# Altium PCB NanoEEG_1v1_ADC.PcbDoc
Units mil, origin at the board's own origin, x right, y up, seen from the top; angles counter-clockwise.
Board outline 2598.43 x 2047.24 mil, 2 copper layers (Top Layer, Bottom Layer), stack 65.792 mil thick; 33 components, 58 nets, 316 pads, 130 vias.
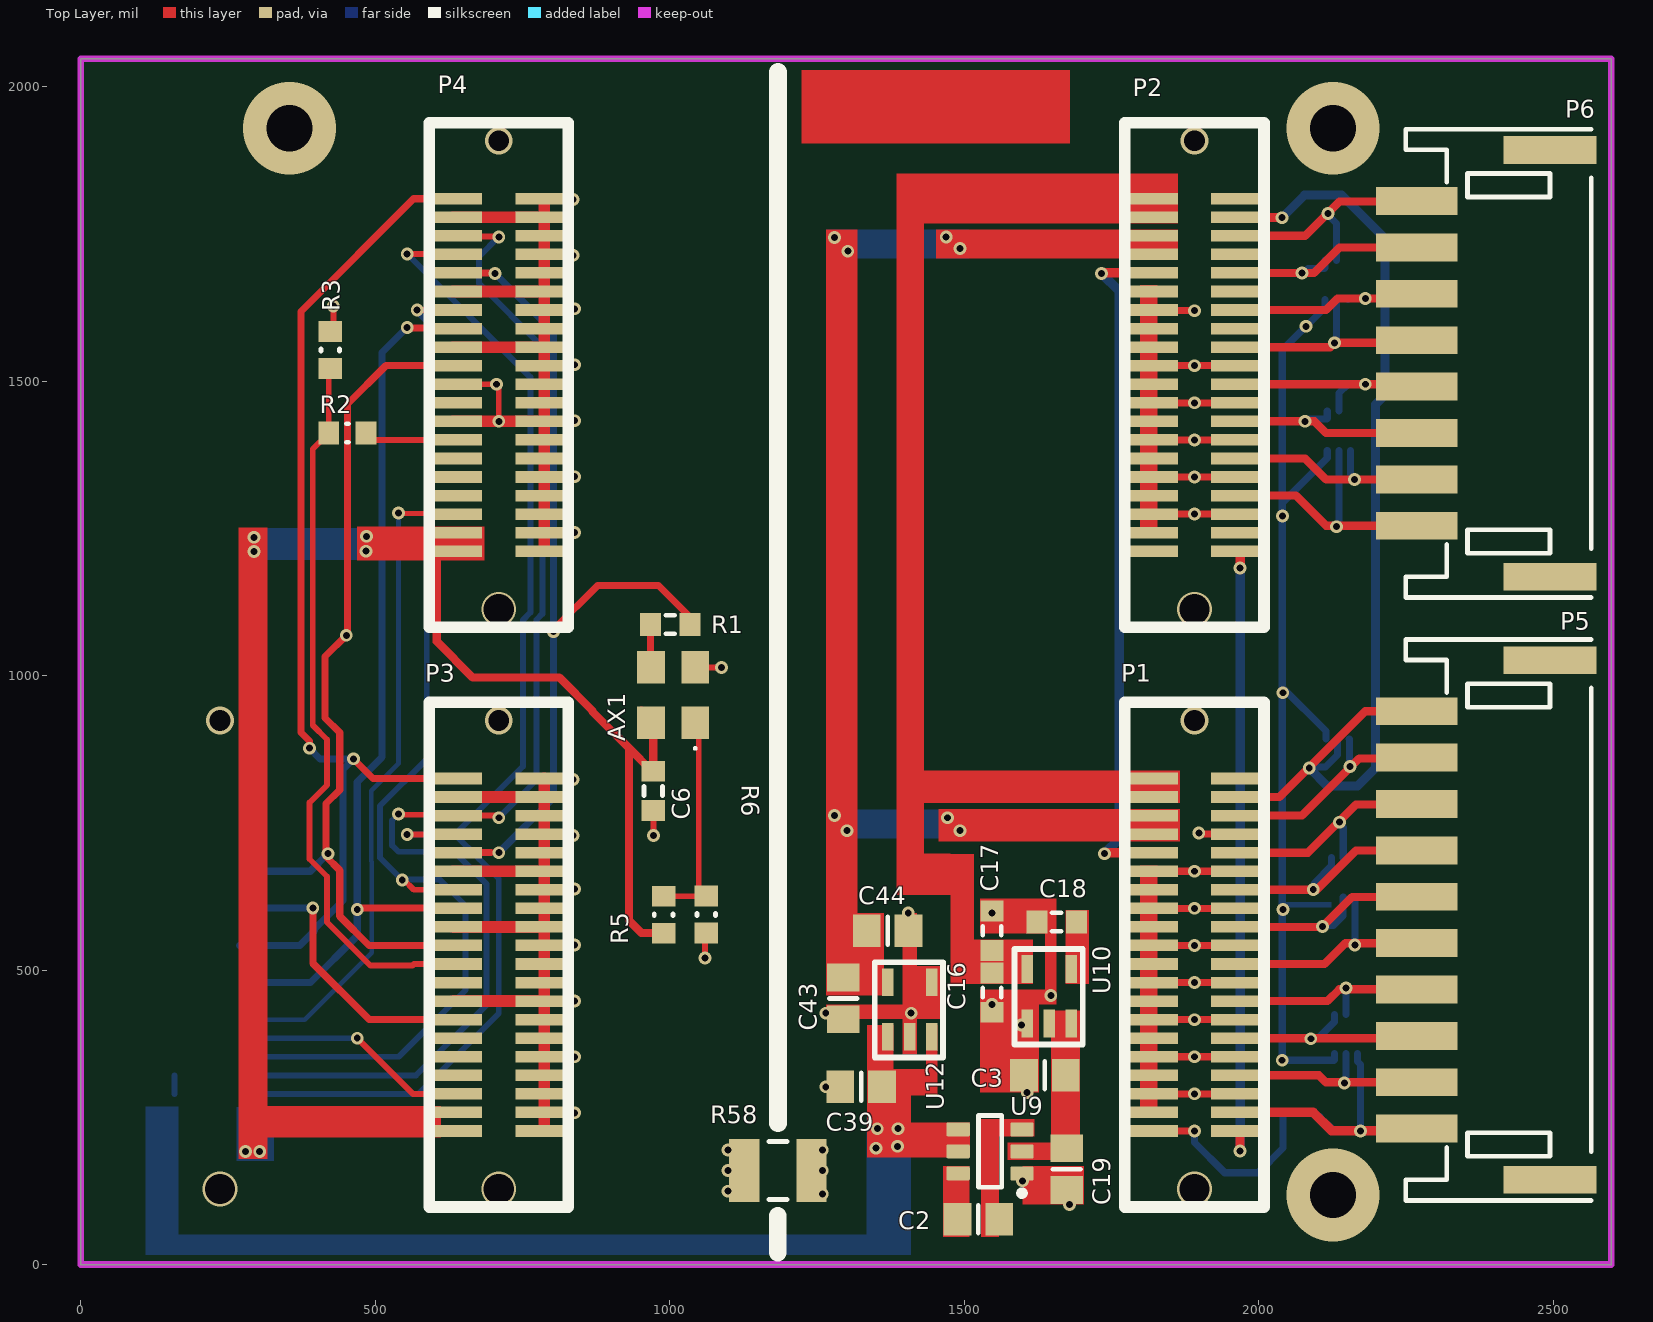
[diagram p0: Top Layer view]
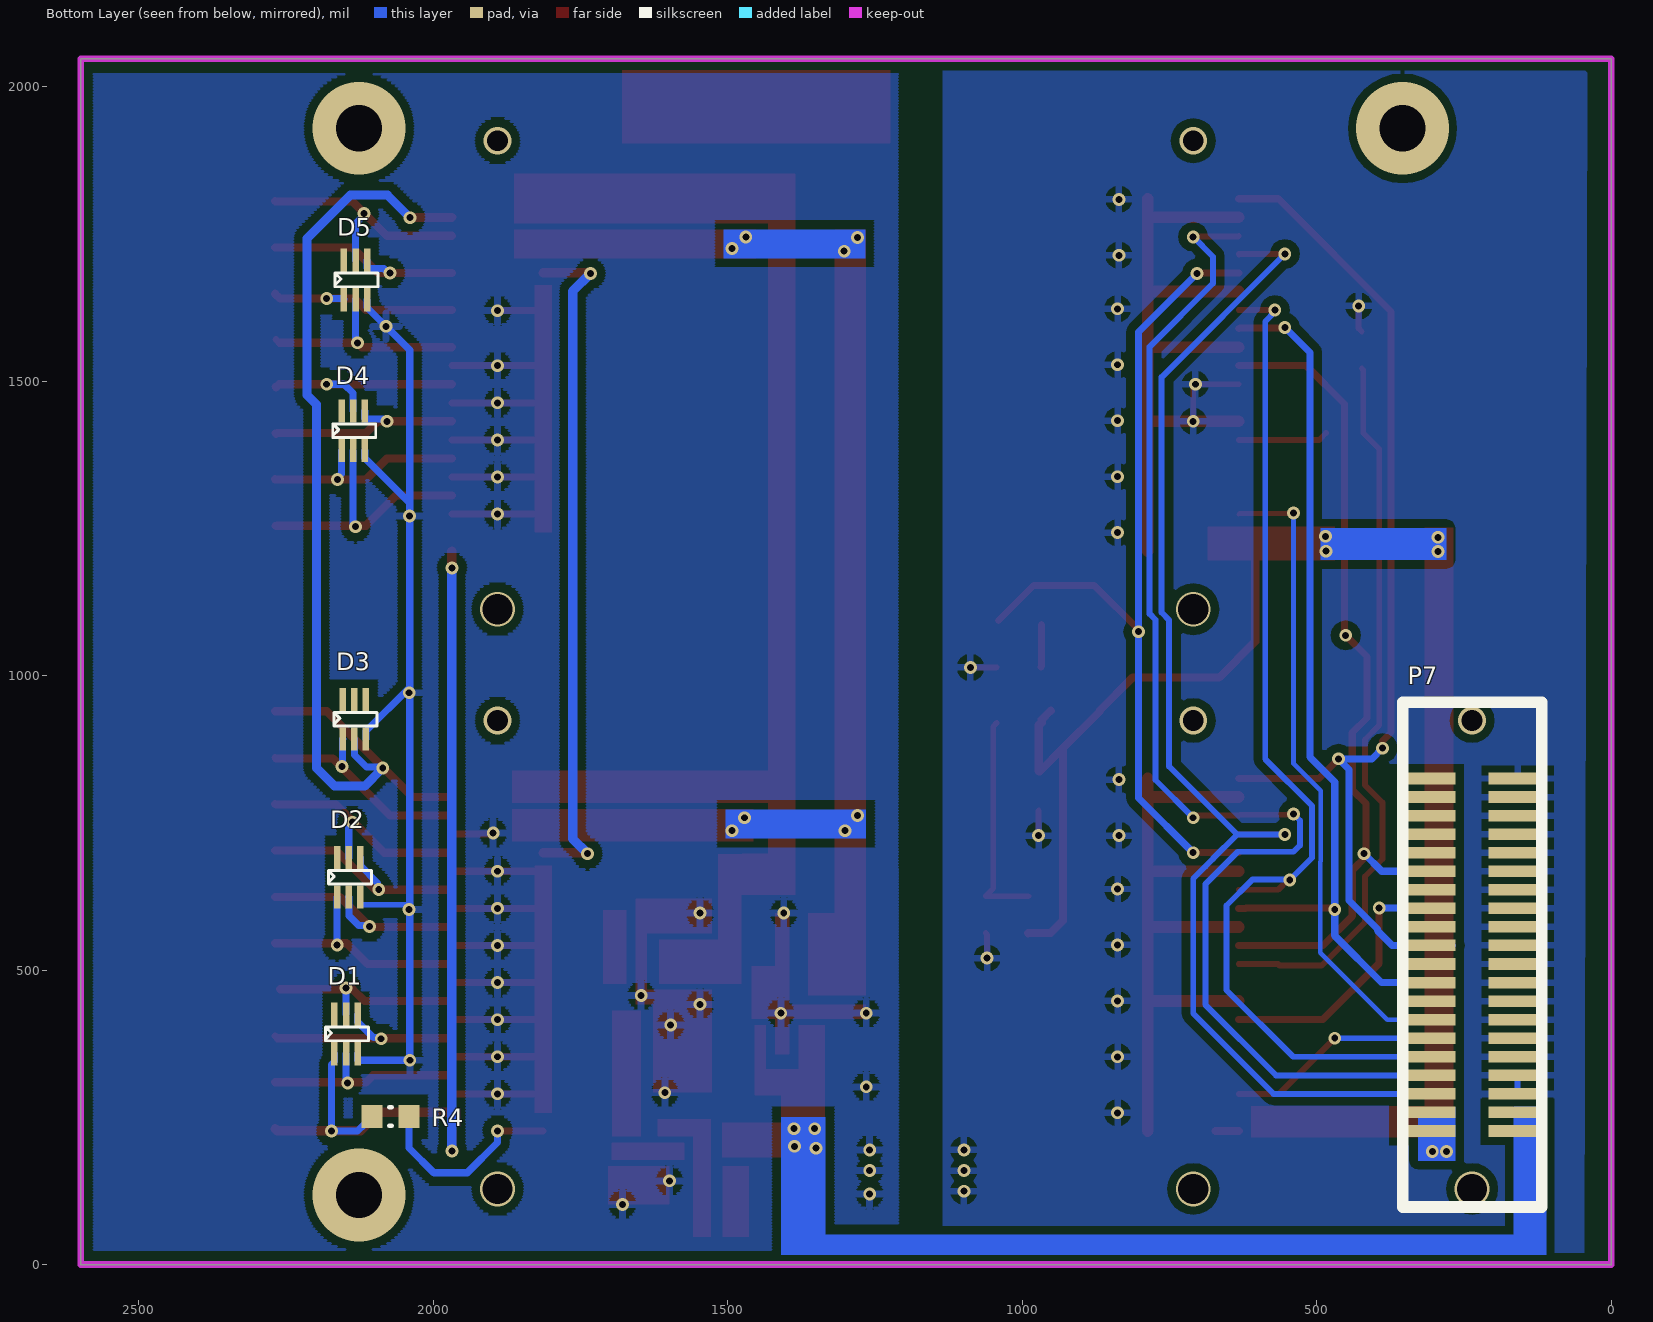
[diagram p1: Bottom Layer view, seen from below]

## Layer stack, top to bottom
Top Solder: solder mask 0.4, Solder Resist, Dk 3.5
Top Layer: signal copper 1.4
Dielectric1: core 62.9921, FR-4, Dk 4.8
Bottom Layer: signal copper 1.4
Bottom Solder: solder mask 0.4, Solder Resist, Dk 3.5

## Board outline
0,0 0,2047.24 2598.43,2047.24 2598.43,0.02

## Design rules (kind name [scope] priority, off if disabled: settings)
Clearance Clearance_1 [InPolygon] p1: gap=14 ignorepadtopadclearanceinfootprint=FALSE except(0: Arc-Hole Track-Hole SMDPad-Hole THPad-Hole Via-Hole Fill-Hole Poly-Hole Region-Hole Text-Hole)
Clearance [All] p2: gap=6 ignorepadtopadclearanceinfootprint=FALSE except(0: Arc-Hole Track-Hole SMDPad-Hole THPad-Hole Via-Hole Fill-Hole Poly-Hole Region-Hole Text-Hole)
FabricationTestPointUsage TestPointUsage [All] p1: valid=0 allowmultiple=FALSE
FabricationTestpoint Testpoint [(IsPad And (OnTopLayer Or OnBottomLayer))] p1: side=3 testpointundercomponent=TRUE minsize=40 maxsize=100 preferedsize=60 minholesize=0 maxholesize=40 preferedholesize=32 testpointgrid=1 allowsidetop=TRUE allowsidebottom=TRUE usegrid=TRUE gridtolerance=0.01
HoleSize [All] p1: absolutevalues=TRUE maxlimit=787.4 minlimit=11.81 maxpercent=80.000 minpercent=20.000
HoleToHoleClearance [All] p1: gap=0 allowstackedmicrovias=TRUE
MinimumSolderMaskSliver [All] p1: minsoldermaskwidth=0
PlaneClearance [All] p1: clearance=15.75
PlaneConnect [All] p1: planeconnectstyle=Direct reliefexpansion=11.81 reliefentries=4 reliefconductorwidth=11.81 reliefairgap=11.81
PolygonConnect [All] p1: connectstyle=Relief reliefconductorwidth=11.81 reliefentries=4 polygonreliefangle="90 Angle" airgapwidth=11.81
RoutingVias [All] p1: holewidth=19.68 width=51.18 viastyle="Through Hole" minholewidth=11.81 minwidth=19.68 maxholewidth=393.7 maxwidth=787.4
SilkToSilkClearance [All] p1: silktosilkclearance=0
SilkToSolderMaskClearance SilkscreenOverComponentPads [IsPad] p1: minsilkscreentomaskgap=0 clearancetoexposedcopper=TRUE
SolderMaskExpansion [All] p1: expansion=4
Width [All] p1: maxlimit=200 minlimit=6 preferedwidth=10
21 further rules are at their usual default settings.

## Components (designator, comment, footprint, x,y, rotation, side; value= is the part's Value field where it differs from the comment)
AX1 "2.048MHz" EPSON-SG-310-4_V 1005.79,966.98 r90 top
C2 "10UF" RESC2012N 1523.81,77.18 r180 top
C3 "2.2UF" RESC2012N 1636.88,321.82 r0 top
C6 "0.1uF" RESC1608N 972.03,804.11 r270 top
C16 "2.2UF" RESC1608N 1546.88,461.82 r90 top
C17 "2.2UF" RESC1608N 1546.88,566.82 r270 top
C18 "0.01UF" RESC1608N 1656.88,581.82 r0 top
C19 "10UF" RESC2012N 1673.81,162.18 r90 top
C39 "2.2UF" RESC2012N 1324.87,301.88 r0 top
C43 "2.2UF" RESC2012N 1294.87,451.88 r90 top
C44 "10UF" RESC2012N 1369.87,566.88 r180 top
D1 "TPD4E1B06" erjiguan 2167.61,358.05 r90 bottom
D2 "TPD4E1B06" erjiguan 2163.1,623.85 r90 bottom
D3 "TPD4E1B06" erjiguan 2153.58,892.45 r90 bottom
D4 "TPD4E1B06" erjiguan 2155.58,1382.46 r90 bottom
D5 "TPD4E1B06" erjiguan 2151.53,1638.16 r90 bottom
P1 "Header 20X2" FCI-B2B-0.8mm-40p-male 1968.2,825.31 r90 top locked
P2 "Header 20X2" FCI-B2B-0.8mm-40p-MALE 1968.2,1809.56 r90 top locked
P3 "Header 20X2" FCI-B2B-0.8mm-40p-male 787.1,825.31 r90 top locked
P4 "Header 20X2" FCI-B2B-0.8mm-40p-MALE 787.1,1809.56 r90 top locked
P5 "Header 10" PH2.0-WS-10P 2494.41,585.14 r90 top locked
P6 "Header 8" PH2.0-WS-8P 2494.41,1530.02 r90 top locked
P7 "Header 20X2" FCI-B2B-0.8mm-40p-FEMALE 158.86,226.89 r90 top locked
R1 "Res1" RESC1608N 1000.79,1086.98 r0 top value=0
R2 "Jumper" RESC0603(1608)_N 452.65,1411.91 r0 top value="0.00 Ohm"
R3 "Jumper" RESC0603(1608)_N 423.56,1552.78 r90 top value="0.00 Ohm"
R4 "Jumper" RESC0603(1608)_N 2072.58,251.18 r0 bottom value="0.00 Ohm"
R5 "Jumper" RESC0603(1608)_N 989.71,593.96 r90 top value="0.00 Ohm"
R6 "Jumper" RESC0603(1608)_N 1061.94,594.44 r270 top value="0.00 Ohm"
R58 "Res1" RESC3225N 1183.57,159.8 r180 top value=0
U9 "LM2664M6" DBV0006A_N 1543.81,192.18 r180 top
U10 "TPS72325" SOT23_5 1607.08,501.82 r0 top
U12 "TLV70025-Q1" SOT23_5 1370.07,479.4 r0 top

## Footprints (in the part's own frame and the unit in brackets; to place one, negate y for a bottom-side part, rotate by r counter-clockwise, add the part's x,y. Pads: shape width x height; smd on the part's side, far side on the other; paste and mask are expansions set on the pad)
DBV0006A_N [mm] "SOT23, 6-Leads, Body 3.05x1.75mm, Pitch 0.95mm, IPC Medium Density"
  rrect17% 1x0.6 smd: 1(-1.375,0.95) 2(-1.375,0) 3(-1.375,-0.95) 4(1.375,-0.95) 5(1.375,0) 6(1.375,0.95)
  silkscreen extent -1.5,-1.55 0.5,1.92, body extent -1.42,-1.46 1.42,1.46, height 1.11
EPSON-SG-310-4_V [mm] "SMD, 4-Leads, Body 3.2x2.5mm"
  rect 1.4x1.2 smd: 1(-1.2,-0.95) 2(1.2,-0.95) 3(1.2,0.95) 4(-1.2,0.95)
  silkscreen extent -2.35,-1 -2.25,-0.9, body extent -1.6,-1.25 1.6,1.25, height 1.05
erjiguan [mm]
  rect 1x0.28 smd: 1(0,0) 2(0,-0.5) 3(0,-1) 4(1.7,-1) 5(1.7,-0.5) 6(1.7,0)
  silkscreen extent 0.56,-1.47 1.14,0.38
FCI-B2B-0.8mm-40p-FEMALE [mm]
  rect 0.5x2.5 smd far side: 1(0,0) 1(0,0) 2(0,-3.93) 2(0,-3.93) 3(0.8,0) 4(0.8,-3.93) 5(1.6,0) 6(1.6,-3.93) 7(2.4,0) 8(2.4,-3.93) 9(3.2,0) 10(3.2,-3.93) 11(4,0) 12(4,-3.93) 13(4.8,0) 14(4.8,-3.93) 15(5.6,0) 16(5.6,-3.93) 17(6.4,0) 18(6.4,-3.93) 19(7.2,0) 20(7.2,-3.93) 21(8,0) 22(8,-3.93) 23(8.8,0) 24(8.8,-3.93) 25(9.6,0) 26(9.6,-3.93) 27(10.4,0) 28(10.4,-3.93) 29(11.2,0) 30(11.2,-3.93) 31(12,0) 32(12,-3.93) 33(12.8,0) 34(12.8,-3.93) 35(13.6,0) 36(13.6,-3.93) 37(14.4,0) 38(14.4,-3.93) 39(15.2,0) 40(15.2,-3.93)
FCI-B2B-0.8mm-40p-male [mm]
  rect 0.5x2.5 smd: 1(0,0) 1(0,0) 2(0,3.93) 2(0,3.93) 3(-0.8,0) 4(-0.8,3.93) 5(-1.6,0) 6(-1.6,3.93) 7(-2.4,0) 8(-2.4,3.93) 9(-3.2,0) 10(-3.2,3.93) 11(-4,0) 12(-4,3.93) 13(-4.8,0) 14(-4.8,3.93) 15(-5.6,0) 16(-5.6,3.93) 17(-6.4,0) 18(-6.4,3.93) 19(-7.2,0) 20(-7.2,3.93) 21(-8,0) 22(-8,3.93) 23(-8.8,0) 24(-8.8,3.93) 25(-9.6,0) 26(-9.6,3.93) 27(-10.4,0) 28(-10.4,3.93) 29(-11.2,0) 30(-11.2,3.93) 31(-12,0) 32(-12,3.93) 33(-12.8,0) 34(-12.8,3.93) 35(-13.6,0) 36(-13.6,3.93) 37(-14.4,0) 38(-14.4,3.93) 39(-15.2,0) 40(-15.2,3.93)
  silkscreen extent -18.48,-1.04 3.28,4.96
FCI-B2B-0.8mm-40p-MALE [mm]
  rect 0.5x2.5 smd: 1(0,0) 1(0,0) 2(0,3.93) 2(0,3.93) 3(-0.8,0) 4(-0.8,3.93) 5(-1.6,0) 6(-1.6,3.93) 7(-2.4,0) 8(-2.4,3.93) 9(-3.2,0) 10(-3.2,3.93) 11(-4,0) 12(-4,3.93) 13(-4.8,0) 14(-4.8,3.93) 15(-5.6,0) 16(-5.6,3.93) 17(-6.4,0) 18(-6.4,3.93) 19(-7.2,0) 20(-7.2,3.93) 21(-8,0) 22(-8,3.93) 23(-8.8,0) 24(-8.8,3.93) 25(-9.6,0) 26(-9.6,3.93) 27(-10.4,0) 28(-10.4,3.93) 29(-11.2,0) 30(-11.2,3.93) 31(-12,0) 32(-12,3.93) 33(-12.8,0) 34(-12.8,3.93) 35(-13.6,0) 36(-13.6,3.93) 37(-14.4,0) 38(-14.4,3.93) 39(-15.2,0) 40(-15.2,3.93)
  silkscreen extent -18.48,-1.04 3.28,4.96
PH2.0-WS-8P [mm] "长：20mm，宽：7.6mm，高：5.5mm"
  rect 1.2x4 smd: 0(-9.2,-0.006) 0(9.2,-0.006)
  rect 1.2x3.5 smd: 1(-7,5.744) 2(-5,5.744) 3(-3,5.744) 4(-1,5.744) 5(1,5.744) 6(3,5.744) 7(5,5.744) 8(7,5.744)
  silkscreen extent -10.1,-1.78 10.1,6.22, body extent -10,-1.65 10,6.95, height 5.55
PH2.0-WS-10P [mm] "长：24mm，宽：7.6mm，高：5.5mm"
  rect 1.2x4 smd: 0(-11.2,-0.006) 0(11.2,-0.006)
  rect 1.2x3.5 smd: 1(-9,5.744) 2(-7,5.744) 3(-5,5.744) 4(-3,5.744) 5(-1,5.744) 6(1,5.744) 7(3,5.744) 8(5,5.744) 9(7,5.744) 10(9,5.744)
  silkscreen extent -12.1,-1.78 12.1,6.22, body extent -12,-1.65 12,6.95, height 5.55
RESC0603(1608)_N [mm] "Chip Resistor, Body 1.6x0.8mm, IPC Medium Density"
  rect 0.9x1 smd: 1(-0.8,0) 2(0.8,0)
  silkscreen extent -0.05,-0.4 0.05,0.4, body extent -0.85,-0.47 0.85,0.47, height 0.6
RESC1608N [mm] "Chip Resistor, Body 1.6x0.8mm, IPC Medium Density"
  rect 0.9x1 smd: 1(-0.85,0) 2(0.85,0)
  silkscreen extent -0.2,-0.4 0.2,0.4, body extent -0.85,-0.48 0.85,0.48, height 0.6
RESC2012N [mm] "Chip Resistor, Body 2.0x1.3mm, IPC Medium Density"
  rect 1.2x1.4 smd: 1(-0.9,0) 2(0.9,0)
  silkscreen extent 0,-0.6 0,0.6, body extent -1.07,-0.7 1.07,0.7, height 0.65
RESC3225N [mm] "Chip Resistor, Body 3.2x2.5mm, IPC Medium Density"
  rect 1.3x2.7 smd: 1(-1.45,0) 2(1.45,0)
  silkscreen extent -0.4,-1.25 0.4,1.25, body extent -1.68,-1.32 1.68,1.32, height 0.71
SOT23_5 [mm]
  rect 0.5x1.2 smd: 1(0,-2.35) 2(0.95,-2.35) 3(1.9,-2.35) 4(1.9,0) 5(0,0)
  silkscreen extent -0.56,-3.25 2.39,0.86

## Part data
AX1: library part "Active Cyrstal 5x7"
C2 C19 C44: library part CAP_0603
C3 C16 C17 C18 C39 C43: library part CAP_0402
C6: library part 电容
P1 P2 P3 P4 P7: "Header, 20-Pin, Dual row", LatestRevisionDate=17-Jul-2002, LatestRevisionNote="Re-released for DXP Platform.", Publisher="Altium Limited"
P5: "Header, 10-Pin", LatestRevisionDate=17-Jul-2002, LatestRevisionNote="Re-released for DXP Platform.", Publisher="Altium Limited"
P6: "Header, 8-Pin", LatestRevisionDate=17-Jul-2002, LatestRevisionNote="Re-released for DXP Platform.", Publisher="Altium Limited"
R1 R58: "Resistor", LatestRevisionDate=17-Jul-2002, LatestRevisionNote="Re-released for DXP Platform.", PackageDescription="Axial Device, Thru-Hole; 2 Leads; 0.3 in Pin Spacing", PackageReference=AXIAL-0.3, Published=8-Jun-2000, Publisher="Altium Limited"
R2 R3 R4 R5 R6: library part CMP-1012-00001-1, "Jumper 0603 (1608 Metric)", Case-EIA=0603, Case-Metric=1608, Power=None, Technology=SMT, Tolerance=None
U9: library part CMP-0065-00095-3, "Switched Capacitor Voltage Converter, 6-pin SOT-23", Manufacturer="Texas Instruments", PackageTopMarking=S03A*XTT, PowerWise=N, Code_IPC=SOT26A-6, Code_JEDEC=MO-178-AB, ComponentLink1Description="Datasheet URL", ComponentLink1URL=http://www.ti.com/general/docs/lit/getliterature.tsp?genericPartNumber=LM2664&fileType=pdf, CompType="Switch Caps", PackageDescription="Molded SOT-23, .115 x .063 x .040in Body, 6 Lead, .0375in in Pitch", PackageReference=DBV0006A, PinCount=6, RoHS=N
U10: "-2.5V"

## Via types
v1: diameter 21.65, hole 11.81, Top Layer to Bottom Layer, 117 vias
v2: diameter 59.06, hole 51.18, Top Layer to Bottom Layer, 5 vias
v3: diameter 47.24, hole 35.43, Top Layer to Bottom Layer, 5 vias
v4: diameter 157.48, hole 78.74, Top Layer to Bottom Layer, 3 vias

## Nets (pads, with @x,y where several pads share a name; then routed paths per layer and width w, separated by ;. In a path a pad name is that pad's centre, name@x,y a point inside that pad or via, vN(x,y) a via of type N, cw(c..) or ccw(c..) an arc to the next point about the centre after c; other vN are vias at no path point)
3.3VD: AX1.4 C6.1 P3.38 P3.40 P4.38 P4.40 P7.2 P7.4 R5.1 | length 1151.3
  Top Layer w14: P3.40 P3.40@671.74,226.89 ; P4.40 607.37,1211.14 604.53,1208.3 604.53,1057.8 665.41,996.92 812.41,996.92 869.03,940.3 869.03,938.61 930.82,876.81 ; AX1.4@951.76,940.3 966.8,925.26 966.8,919.74 AX1.4 972.03,916.09 C6.1 970.06,837.58 930.82,876.81 ; R5.1 989.23,562.94 951.76,562.94 930.82,583.88 930.82,876.81
  other v1: 279.88,191.85 303.83,191.85 294.19,1210.67 484.14,1211.14 294.19,1234.72 485.27,1236.43
-RAW: C3.2 C19.2 U9.2 U10.2 U10.3
ADC_CLKEN: AX1.1 R5.2 R6.1 | length 374
  Top Layer w10: R5.2 1061.46,625.45 R6.1 1049.22,638.65 1049.22,913.7 AX1.1
AGND: C3.1 C16.1 C17.1 C18.1 C19.1 C39.1 C43.1 C44.1 D1.3 D2.3 D3.3 D4.3 D5.3 P1.7 P1.11 P1.12 P1.14 P1.15 P1.16 P1.18 P1.19 P1.20 P1.22 P1.23 P1.24 P1.26 P1.27 P1.28 P1.30 P1.31 P1.32 P1.34 P1.35 P1.36 P1.38 P2.12 P2.14 P2.16 P2.18 P2.19 P2.20 P2.22 P2.23 P2.24 P2.26 P2.27 P2.28 P2.30 P2.31 P2.32 P2.34 P2.35 P2.36 P2.38 R58.1 U9.1 U10.1 U12.2 U12.4 | length 3662.8
  Top Layer w12: P1.36 v1(1890.84,289.88) P1.35 ; P1.32 v1(1890.84,352.87) P1.31 ; P1.28 v1(1890.84,415.86) P1.27 ; P1.24 v1(1890.84,478.86) P1.23 ; P1.20 v1(1890.84,541.85) P1.19 ; P1.16 v1(1890.84,604.84) P1.15 ; P1.12 v1(1890.84,667.83) P1.11 ; P2.36 P2.35 ; P2.32 P2.31 ; P2.28 P2.27 ; P2.24 P2.23 ; P2.20 P2.19 ; P2.14 1814.54,1619.52 v1(1890.84,1619.52) ; v1@1900.05,730.82 P1.7
  Bottom Layer w12: D5.3 2112.16,1624.97 2039.8,1552.6 2039.8,1292.85 ; D3.3 2114.21,905.64 v1@2039.8,980.06 ; D4.3 2116.21,1369.27 2039.8,1292.85 ; D1.3 2128.24,347.45 2127.76,346.97 v1(2039.8,346.97) v1@2039.8,980.06 ; v1@2039.8,980.06 2039.8,1292.85
  other v1: 1678.81,102.18 1259.09,119.71 1598.81,142.18 1259.09,159.71 1259.09,194.71 1606.88,291.82 1264.87,301.88 1596.88,406.82 1264.87,426.88 1409.87,426.88 1546.88,441.82 1646.88,456.82 1404.87,596.88 1546.88,596.82 2041.08,602.73 1898.16,732.71 2040.89,970.88 2040.38,1270.88 1890.84,1274.13 1890.84,1337.12 1890.84,1400.12 1890.84,1463.11 1890.84,1526.1 2080.2,1593.01
AVDD: C43.2 C44.2 P1.6 P1.8 P2.6 P2.8 U12.5
  other v1: 1300.93,736.68 1492.57,736.68 1471.66,758.63 1279.76,762.32 1302.23,1720.56 1492.57,1724.93 1279.76,1743.94 1469.22,1744.81
AVSS: C16.2 C17.2 P1.2 P1.4 P2.2 P2.4 U10.5
BATT_RUN: C39.2 P7.1 P7.3 U9.4 U9.5 U12.1 U12.3
  other v1: 1350.12,197.61 1386.7,200.83 1352.38,230.81 1387.38,230.81
GND: AX1.2 C6.2 P3.1 P3.3 P3.4 P3.5 P3.7 P3.9 P3.11 P3.12 P3.13 P3.15 P3.17 P3.18 P3.19 P3.21 P3.23 P3.25 P3.26 P3.27 P3.29 P3.31 P3.33 P3.35 P3.37 P3.39 P4.1 P4.3 P4.4 P4.5 P4.7 P4.9 P4.11 P4.12 P4.13 P4.15 P4.17 P4.18 P4.19 P4.21 P4.22 P4.23 P4.25 P4.26 P4.27 P4.29 P4.31 P4.33 P4.35 P4.37 P4.39 P7.5 P7.7 P7.9 P7.11 P7.13 P7.15 P7.17 P7.19 P7.21 P7.23 P7.25 P7.27 P7.29 P7.31 P7.33 P7.35 P7.37 P7.39 R3.2 R6.2 R58.2 | length 2780.5
  Top Layer w10: R3.2 428.83,1589.54 v1(428.83,1627.55) ; P4.22 v1(706.05,1494.6) 706.05,1491.45 709.73,1487.76 v1(709.73,1431.61) ; C6.2 972.27,770.41 v1(972.27,728.46) ; AX1.2 1043.64,1013.77 v1(1087.9,1013.77) ; v1(1059.68,520.41) 1059.68,560.68 R6.2
  Top Layer w20: P3.26 P3.25 ; P3.18 P3.17 ; P3.12 P3.11 ; P3.4 P3.3 ; P4.26 v1(709.73,1431.61) P4.25 ; P4.18 P4.17 ; P4.12 P4.11 ; P4.4 P4.3 ; P3.39 P3.37 P3.35 P3.33 P3.31 P3.29 P3.27 P3.25 ; P3.1@787.1,825.31 P3.3 ; P4.39 P4.37 P4.35 P4.33 P4.31 P4.29 P4.27 P4.25 ; P4.1@787.1,1809.56 P4.3 ; P3.25 P3.23 P3.21 P3.19 P3.17 ; P3.17 P3.15 P3.13 P3.11 ; P3.11 P3.9 P3.7 P3.5 P3.3 ; P4.25 P4.23 P4.21 P4.19 P4.17 ; P4.17 P4.15 P4.13 P4.11 ; P4.11 P4.9 P4.7 P4.5 P4.3
  Bottom Layer w10: P7.5 P7.7
  other v1: 1099.09,124.71 1099.09,159.71 1099.09,194.71 838.16,257.71 838.16,352.71 838.16,447.71 838.16,542.71 838.16,637.71 835.84,728.46 835.84,823.46 838.16,1242.71 838.16,1337.71 838.16,1432.71 838.16,1527.71 838.16,1622.71 835.84,1713.46 835.84,1808.46
MOD1_BIASIN: P1.40 R4.1 | length 339.2
  Top Layer w12: P1.40 v1(1890.84,226.9)
  Bottom Layer w12: v1(1890.84,226.9) 1890.84,207.22 1942.15,155.9 1999.02,155.9 2041.08,197.97 R4.1
MOD1_BIASOUT: D1.1 P1.37 P5.1 R4.2 | length 527.5
  Top Layer w16: P1.37 2092.6,258.38 2123.43,227.56 2265,227.56 P5.1
  Bottom Layer w12: R4.2 2104.07,249.21 2115.79,237.5 2117.76,237.5 2128.35,226.9 v1(2172.88,226.9) 2172.88,339.59 2167.61,344.85 D1.1
MOD1_DSYIN: P3.22 R2.1 R3.1 | length 1232.7
  Top Layer w10: R3.1 421.15,1518.87 R2.1 393.98,1384.74 393.98,915.54 417.96,891.56 417.96,814.05 388.23,784.32 388.23,688.74 417.96,659.01 417.96,581.49 491.73,507.71 563.16,507.71 565.8,510.35 P3.22
MOD1_GPIO1: P3.24
MOD1_GPIO2: P3.30
MOD1_GPIO3: P3.32
MOD1_GPIO4: P3.34
MOD1_IN1P: D3.1 P1.5 P5.9 | length 388.3
  Top Layer w12: P5.9@2266.79,859.27 P5.9
  Top Layer w14: P1.5 2073.55,762.32 2170.51,859.27 P5.9@2266.79,859.27
  Bottom Layer w12: D3.1 2154.07,891.96 2154.07,846.12 v1(2154.73,845.46)
MOD1_IN2P: D2.5 P1.9 P5.8 | length 397.2
  Top Layer w14: P1.9 2083.42,699.33 2165.17,781.08 2267.34,781.08 P5.8
  Bottom Layer w12: v1(2137.25,751.14) 2137.25,748.53 2143.41,742.37 D2.5
MOD1_IN3P: D2.4 P1.13 P5.7 | length 388.8
  Top Layer w14: P1.13 v1@2092.46,636.34 ; v1@2098.26,636.34 2165.17,703.25 P5.7
  Bottom Layer w12: v1(2092.46,636.87) 2094.31,638.71 2094.31,648.16 2123.73,677.59 D2.4
MOD1_IN4P: D2.2 P1.17 P5.6 | length 395.4
  Top Layer w12: P5.6@2268,624.25 P5.6
  Top Layer w14: P1.17 2107.6,573.34 2158.51,624.25 P5.6@2268,624.25
  Bottom Layer w12: v1(2108.2,573.92) 2110.04,575.76 2126.51,575.76 2142.92,592.18 2142.92,623.36 D2.2
MOD1_IN5P: D2.1 P1.21 P5.5 | length 396.4
  Top Layer w12: P1.21 1968.81,510.97 P1.21@1969.43,510.35
  Top Layer w14: P1.21@1969.43,510.35 2111.69,510.35 2147.11,545.77 P5.5
  Bottom Layer w12: v1(2163.1,542.71) D2.1
MOD1_IN6P: D1.5 P1.25 P5.4 | length 344.9
  Top Layer w12: P5.4@2259.77,467.31 P5.4@2260.04,467.03
  Top Layer w14: P1.25 2116.69,447.36 2136.64,467.31 P5.4@2259.77,467.31
  Bottom Layer w12: D1.5 2148.04,425.09 2148.04,469.43 v1(2148.15,469.54)
MOD1_IN7P: D1.4 P1.29 P5.3 | length 366.5
  Top Layer w12: P5.3@2264.33,384.37 P5.3
  Top Layer w14: P1.29 P5.3@2264.33,384.37
  Bottom Layer w12: v1(2088.32,383.44) 2090.16,385.29 2101.75,385.29 2128.24,411.78 D1.4
MOD1_IN8P: D1.2 P1.33 P5.2 | length 355.9
  Top Layer w14: P1.33 2102.34,321.38 2114.16,309.55 P5.2
  Bottom Layer w12: v1(2145.28,308.15) 2145.28,310.77 2147.93,313.41 D1.2
MOD1_NDRDY: P3.36 P7.12 | length 357.1
  Top Layer w10: v1(469.44,384.37) 563.93,289.88 P3.36
  Bottom Layer w10: P7.12 v1@468.61,384.37
MOD2_BIASIN: P2.40
MOD2_BIASOUT: P2.37
MOD2_DOUT: P4.28 R2.2 | length 153.1
  Top Layer w10: R2.2 495.94,1400.12 P4.28
MOD2_GPIO1: P4.24
MOD2_GPIO2: P4.30
MOD2_GPIO3: P4.32
MOD2_GPIO4: P4.34
MOD2_IN1N: P2.7
MOD2_IN1P: D5.5 P2.5 P6.8 | length 409.6
  Top Layer w14: P2.5 2078.49,1746.57 2136.96,1805.04 2267.68,1805.04 P6.8
  Bottom Layer w12: v1(2117.73,1784.35) 2117.73,1781.74 2131.85,1767.62 D5.5
MOD2_IN2N: P2.11
MOD2_IN2P: D5.4 P2.9 P6.7 | length 373.2
  Top Layer w14: P2.9 v1(2073.55,1683.58) 2093.67,1683.58 2136.96,1726.87 P6.7
  Bottom Layer w12: v1(2073.55,1683.58) 2076.17,1683.58 2084,1691.41 2111.67,1691.41 2112.16,1691.9 D5.4
MOD2_IN3N: P2.15
MOD2_IN3P: D5.1 P2.13 P6.6 | length 342.3
  Top Layer w14: P2.13 2114.16,1620.59 2133.58,1640 v1(2180.81,1640) 2260.12,1640 P6.6
  Bottom Layer w12: D5.1 2151.53,1639.51 2152.02,1640 v1(2180.81,1640)
MOD2_IN4P: D5.2 P2.17 P6.5 | length 378.8
  Top Layer w12: P6.5@2261.04,1564.92 P6.5@2266.88,1570.76
  Top Layer w14: P2.17 2121.19,1557.6 v1(2128.52,1564.92) P6.5@2261.04,1564.92
  Bottom Layer w12: v1(2128.52,1564.92) 2128.52,1567.54 2131.85,1570.87 D5.2
MOD2_IN5P: D4.5 P2.21 P6.4 | length 384.1
  Top Layer w12: P6.4@2266.77,1489.17 P6.4
  Top Layer w14: P2.21 v1(2180.81,1494.6) 2261.34,1494.6 P6.4@2266.77,1489.17
  Bottom Layer w12: D4.5 2136.38,1449.88 2136.38,1479.8 2151.19,1494.6 v1(2180.81,1494.6)
MOD2_IN6P: D4.4 P2.25 P6.3 | length 362
  Top Layer w12: P6.3@2267.05,1410.7 P6.3
  Top Layer w14: P2.25 v1(2078.49,1431.61) 2094.46,1431.61 2114.16,1411.91 2265.84,1411.91 P6.3@2267.05,1410.7
  Bottom Layer w12: v1(2078.49,1431.61) 2081.11,1431.61 2085.2,1435.71 2115.72,1435.71 2116.21,1436.2 D4.4
MOD2_IN7P: D4.1 P2.29 P6.2 | length 367.5
  Top Layer w14: P2.29 2078.72,1368.62 2114.48,1332.85 v1(2162.67,1332.85) 2267.94,1332.85 P6.2
  Bottom Layer w12: D4.1 2155.58,1342.56 2162.67,1335.47 v1(2162.67,1332.85)
MOD2_IN8P: D4.2 P2.33 P6.1 | length 452.8
  Top Layer w12: P6.1@2265.32,1254.43 2266.79,1252.96 P6.1
  Top Layer w14: P2.33 2062.97,1305.63 2114.16,1254.43 P6.1@2265.32,1254.43
  Bottom Layer w12: v1@2134.19,1252.86 2135.89,1254.56 D4.2
  other v1: 2131.85,1252.86
MOD2_NDRDY: P4.36 P7.14 | length 1087
  Top Layer w8: v1(539.37,1275.88) 540.24,1275.01 631.5,1275.01 P4.36
  Bottom Layer w8: P7.14 380.07,415.86 494.01,529.8 494.01,683.64 493.06,684.59 493.06,804.19 539.37,850.5 v1(539.37,1275.88)
MOD_BIASINV: P1.39 P2.39 | length 1052.6
  Top Layer w16: v1(1968.16,192.71) P1.39 ; v1(1968.2,1182.67) P2.39
  Bottom Layer w16: v1(1968.16,192.71) v1(1968.2,1182.67)
MOD_CLK: P3.10 P4.10 R1.2 | length 1508.9
  Top Layer w10: 696.54,699.33 v1(709.73,699.33)
  Top Layer w12: P3.10 696.54,699.33 ; P4.10 702.29,1683.58 v1(703.16,1682.71) ; v1(802.78,1074.49) 802.78,1078.11 877.77,1153.1 980.68,1153.1 R1.2@1040.52,1093.26
  Bottom Layer w12: v1(703.16,1682.71) 802.78,1583.09 v1(802.78,1074.49) 802.78,792.38 v1(709.73,699.33)
MOD_MISO: P3.28 P7.26 | length 452.6
  Top Layer w12: v1(393.98,605.51) 393.98,511.67 489.78,415.86 P3.28
  Bottom Layer w12: P7.26 313.92,605.18 393.64,605.18 v1(393.98,605.51)
MOD_MOSI: P3.2 P4.2 P7.22 | length 1807.7
  Top Layer w12: v1(388.23,876.78) 388.23,888.79 373.83,903.19 373.83,1618.16 565.23,1809.56 P4.2@632.37,1809.56 ; v1(463.03,858.62) 496.3,825.35 P3.2@632.34,825.35
  Bottom Layer w12: P7.22@269.34,541.85 P7.22 371.91,541.85 396.94,566.88 396.94,569.93 445.17,618.16 445.17,840.76 v1(463.03,858.62) 406.39,858.62 v1(388.23,876.78)
MOD_NCS: P3.16 P4.16 P7.18 | length 1499.7
  Top Layer w12: v1(469.44,602.73) 472.23,605.51 620.07,605.51 620.74,604.84 P3.16 ; v1(554.19,1590.88) 555.09,1589.99 631.48,1589.99 P4.16
  Bottom Layer w12: P7.18 389.92,478.86 469.44,558.38 v1(469.44,602.73) 469.44,819.38 511.54,861.48 511.54,1548.23 v1(554.19,1590.88)
MOD_NPWDN: P3.6 P4.6 P7.8 | length 2202.1
  Top Layer w10: v1(539.37,765.05) 540.74,763.69 631,763.69 P3.6 706.05,762.32 v1(709.73,758.63) ; P4.6 633.25,1745.69 708.85,1745.69 v1(709.73,1744.81)
  Bottom Layer w10: P7.8 569.23,321.38 689.12,441.26 689.12,645.88 634.12,700.88 539.37,700.88 528.41,711.84 528.41,754.09 v1(539.37,765.05) ; v1(709.73,758.63) 773.76,822.67 773.76,1094.73 783.78,1104.74 783.78,1558.19 676.07,1665.9 676.07,1711.14 v1(709.73,1744.81)
MOD_NRESET: P3.8 P4.8 P7.6 | length 2151
  Top Layer w10: v1(554.19,730.1) 554.55,730.46 632.01,730.46 P3.8 ; v1(554.19,1715.88) 554.6,1715.48 631.97,1715.48 P4.8
  Bottom Layer w10: P7.6 573.36,289.88 709.73,426.25 709.73,655.45 689.3,675.89 689.12,675.89 676.33,688.67 676.33,688.85 635.08,730.1 ; v1(554.19,730.1) 635.08,730.1 ; v1(554.19,1715.88) 763.37,1506.7 763.37,1106.97 750.53,1094.12 750.53,845.55 635.08,730.1
MOD_SCLK: P3.20 P4.20 P7.30 | length 1453.1
  Top Layer w12: P3.20 489.32,541.85 439.69,591.48 439.69,669.43 416.41,692.71 416.41,782.77 439.69,806.05 439.69,903.27 414.7,928.26 414.7,1032.19 v1(450.81,1068.29) 452.65,1070.14 452.65,1460.84 517.91,1526.1 P4.20
  Bottom Layer w12: P7.30 389.74,667.83 v1(419.62,697.71)
MOD_SRB1: D3.2 P1.3 P2.3 P5.10 | length 1778.6
  Top Layer w14: P1.3 2035.16,793.82 2180.81,939.47 P5.10
  Top Layer w15: P2.3 1968.49,1777.77 2039.09,1777.77 v1(2039.38,1777.48)
  Bottom Layer w12: v1@2087.53,845.02 2113.46,845.02 2133.41,864.96 D3.2@2133.41,891.96
  Bottom Layer w15: v1(2039.38,1777.48) 2077.57,1815.66 2140.73,1815.66 2214.04,1742.35 2214.04,1476.1 2198.38,1460.43 2198.38,843.37 2167.38,812.37 2116.49,812.37 2087.53,841.32 v1@2087.53,845.02
  other v1: 2085.69,843.17
MOD_START: P3.14 P4.14 P7.10 | length 1833.5
  Top Layer w10: v1(545.81,653.05) 548.91,653.05 565.62,636.34 P3.14 ; v1(571.18,1620.59) P4.14
  Bottom Layer w10: P7.10 540.15,352.87 653.19,465.91 653.19,609.75 609.31,653.63 546.39,653.63 v1(545.81,653.05) 508.06,690.8 508.06,778.76 587.4,858.1 587.4,1601.22 571.18,1617.44 v1(571.18,1620.59)
MOD_VREFP: P1.10 P2.10 | length 1163.2
  Top Layer w16: v1@1734.02,1683.58 P2.10 ; v1(1738.16,697.71) 1739.77,699.33 P1.10
  Bottom Layer w16: v1(1733.16,1682.71) 1763.16,1652.71 1763.16,722.71 v1(1738.16,697.71)
NetAX1_3: AX1.3 R1.1 | length 73.2
  Top Layer w12: R1.1 967.32,1015.29 AX1.3
NetC2_1: C2.1 U9.3
NetC2_2: C2.2 U9.6
NetC18_2: C18.2 U10.4
pads on no net: D1.6 D2.6 D3.4 D3.5 D3.6 D4.6 D5.6 P1.1 P2.1 P5.0 P6.0 P7.16 P7.20 P7.24 P7.28 P7.32 P7.34 P7.36 P7.38 P7.40
copper on no net:
  other v2: 236.22,128.46 709.73,128.46 1890.84,128.46 709.73,1112.71 1890.84,1112.71
  other v3: 236.22,923.74 709.73,923.74 1890.84,923.74 709.73,1907.99 1890.84,1907.99
  other v4: 2125.98,118.11 354.33,1929.13 2125.98,1929.13

## Polygon pours and split planes (outlines as drawn)
no net on Top Layer "Top Layer-No Net" (solid, pour order 0): 1409.87,181.71
GND on Bottom Layer "Bottom Layer-GND" (solid, remove dead copper, pour order 4): 45.68,3.66 45.73,3.61 1132.64,3.61 1135.09,6.05 1135.09,2049.6 1133.29,2047.8 40.55,2047.8
AGND on Bottom Layer "Bottom Layer-AGND" (hatched Horizontal grid 5 track 5, remove dead copper, pour order 2): 1211.08,-0.03 1211.13,0.02 2598.43,0.02 2598.43,2047.24 1212.1,2047.24 1212.05,2047.19

## Keep-outs
Keep-Out Layer:
  the board outline again, w11.81

## Other copper
Top Layer:
  rectangle net 3.3VD: 315.28,216.2 611.31,268.97
  rectangle net 3.3VD: 268.26,178.95 317.04,1251.19
  rectangle net AVSS: 1384.56,697.76 1431.87,1767.71
  rectangle net AVDD: 1451.82,1707.71 1863.16,1757.71
  rectangle net AVDD: 1264.87,596.88 1318.88,1757.71
  rectangle net BATT_RUN: 1409.87,181.71 1509.32,241.15
  rectangle: 1223.32,1903.64 1679.27,2028.09
  rectangle net AGND: 1798.16,257.71 1828.16,677.71
  rectangle net AGND: 1798.16,1242.64 1828.16,1662.71
  rectangle net AVSS: 1384.56,1767.71 1863.16,1852.71
  rectangle net 3.3VD: 469.44,1195.27 685.84,1253.46
  rectangle net AVDD: 1455.84,718.46 1865.84,773.46
  rectangle net AVSS: 1431.87,783.46 1865.84,838.46
  rectangle net AVSS: 1384.56,627.56 1476.88,697.76
  rectangle net BATT_RUN: 1409.87,286.88 1434.87,331.88
  rectangle net BATT_RUN: 1434.87,286.88 1454.87,406.88
  rectangle net BATT_RUN: 1334.87,331.88 1379.87,406.88
  rectangle net BATT_RUN: 1334.87,181.71 1409.87,331.88
  rectangle net AGND: 1419.87,416.88 1459.87,506.88
  rectangle net AGND: 1264.87,416.88 1394.87,441.88
  rectangle net AVDD: 1264.87,456.88 1363.48,596.88
  rectangle net AGND: 1394.87,356.88 1419.87,596.88
  rectangle net AVSS: 1476.88,551.82 1516.88,697.33
  rectangle net AGND: 1526.88,561.82 1651.88,621.82
  rectangle net AGND: 1636.88,466.82 1656.88,621.82
  rectangle net AGND: 1626.88,441.82 1656.88,466.82
  rectangle net NetC18_2: 1671.88,476.82 1711.88,601.82
  rectangle net AVSS: 1476.88,476.82 1616.88,551.82
  rectangle net AGND: 1526.88,291.82 1626.88,466.82
  region net AGND: 1703.15,167.18 1598.81,167.18 1598.81,102.18 1703.15,102.18
  region net NetC2_2: 1508.81,167.18 1463.81,167.18 1463.81,47.18 1508.81,47.18
  region net NetC2_1: 1618.81,247.18 1558.81,247.18 1558.81,217.18 1618.81,217.18
  region net NetC2_1: 1558.81,247.18 1528.81,247.18 1528.81,47.18 1558.81,47.18
  rectangle net -RAW: 1646.88,217.18 1696.88,431.82
  region net -RAW: 1697.38,207.18 1573.81,207.18 1573.81,177.18 1697.38,177.18
Bottom Layer:
  rectangle net 3.3VD: 264.41,176.04 328.38,267.74
  rectangle net BATT_RUN: 110.21,50.29 166.34,268.31
  rectangle net BATT_RUN: 1333.83,51.3 1409.87,250.88
  rectangle net BATT_RUN: 110.27,16.24 1409.87,51.3
  rectangle net 3.3VD: 279.4,1195.88 494.01,1250.88
  rectangle net AGND: 2034.88,605.88 2123.29,615.88
  rectangle net AVDD: 1266.45,1708.1 1507.1,1757.66
  rectangle net AVDD: 1264.87,723.44 1503.37,772.71

## Silkscreen, mask and mechanical layers (free items; w line width, h text height)
Top Overlay:
  lines w30: 1183.16,20.63 1183.16,82.77 ; 1183.65,239.8 1183.65,2024.75
Top Solder:
  text "NanoEEG_ADC_1v1" at 1240.92,1979.65 h30
  text "Liu Miao 2019.6" at 1243.4,1924.09 h30